# EAGLE board adapter (EAGLE 7.2.0)
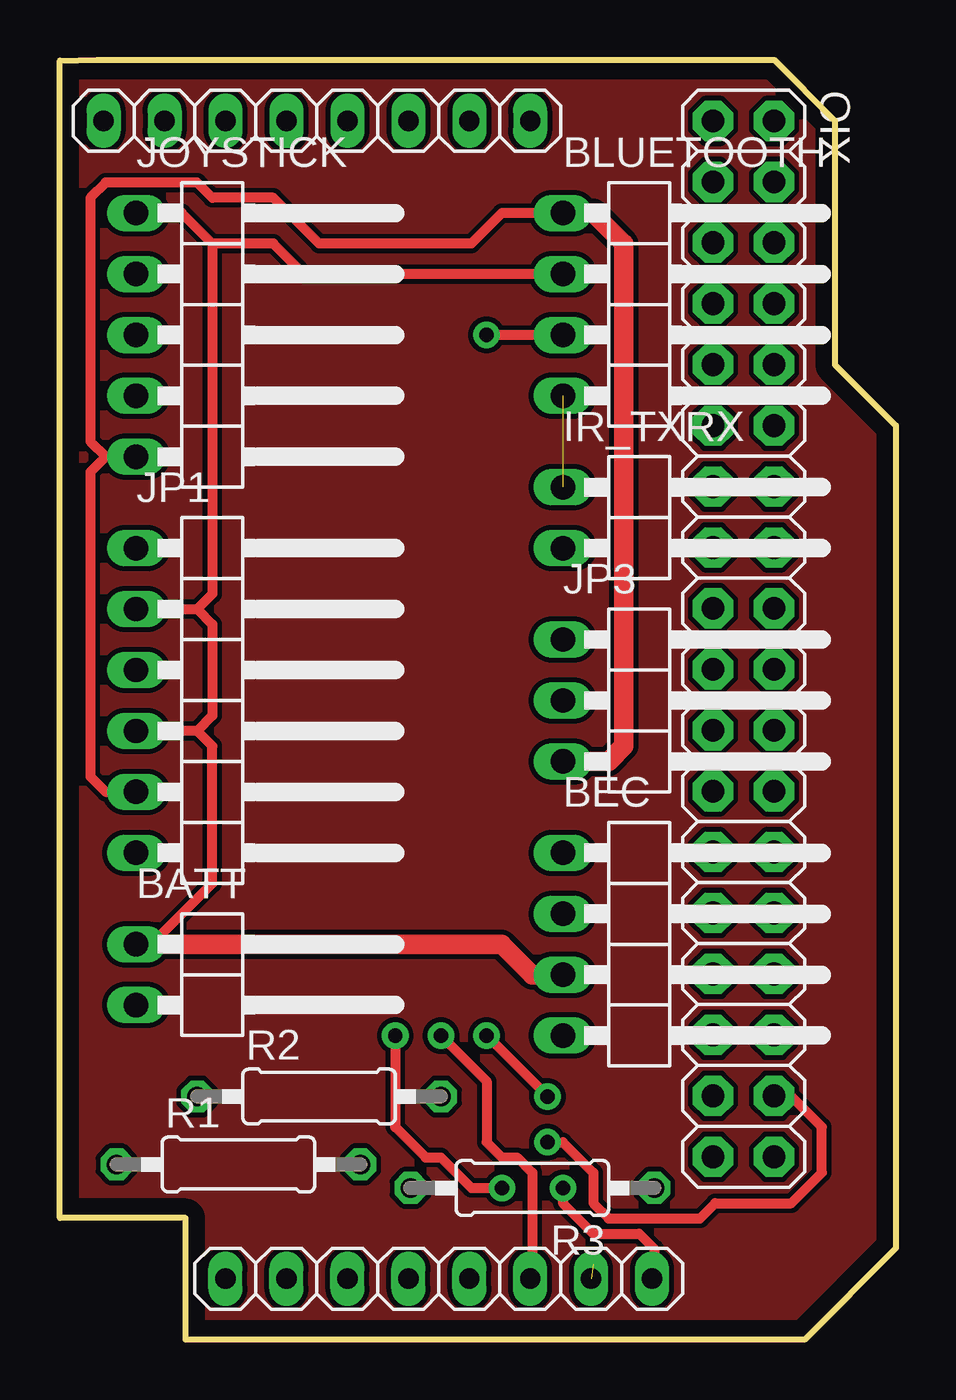
[diagram p0: board, top side]
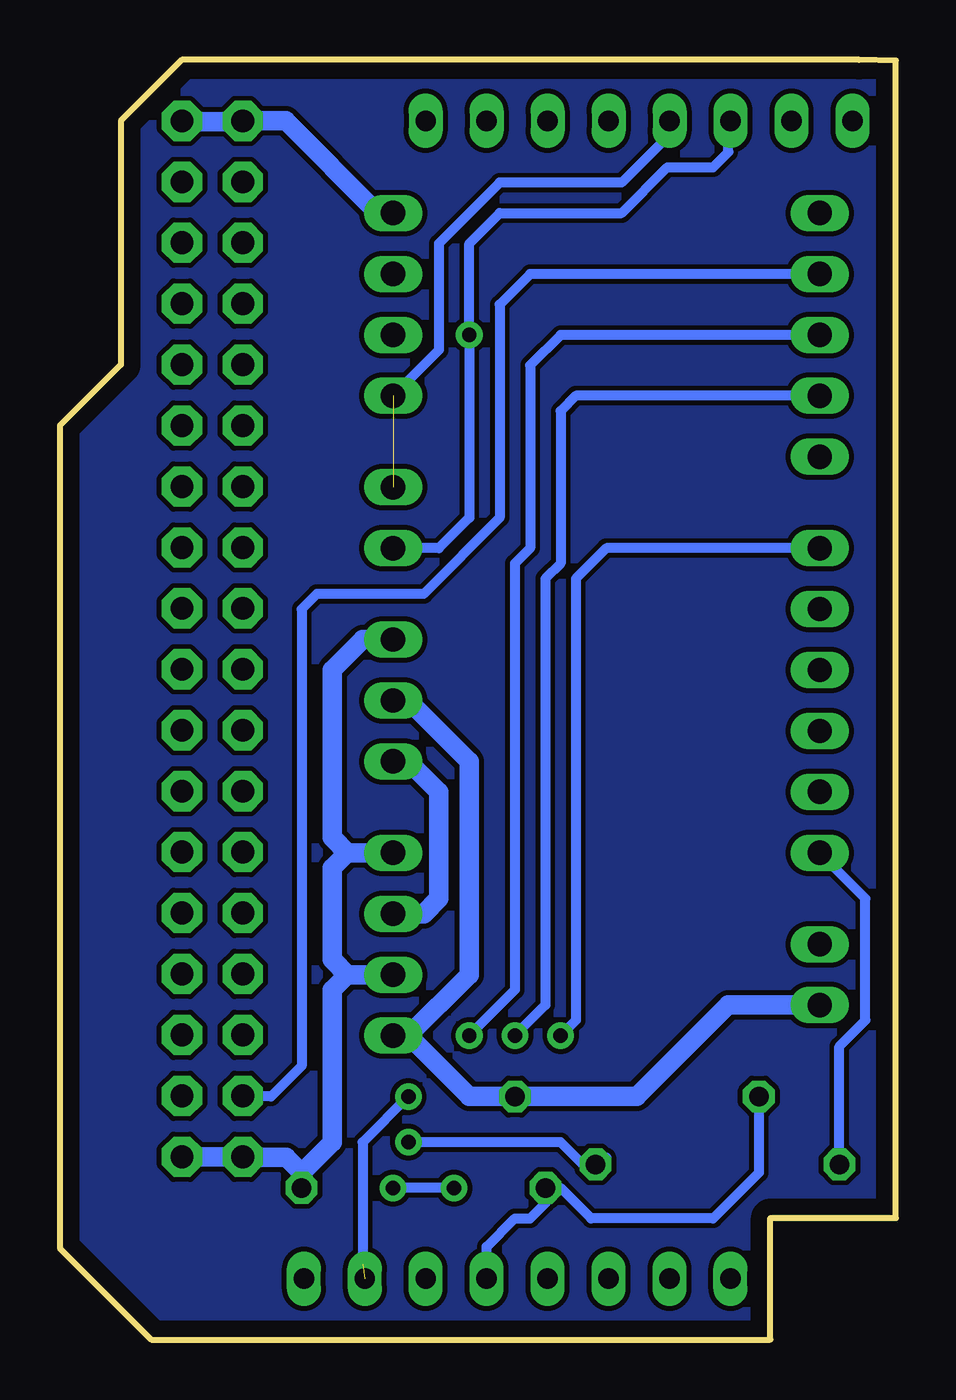
[diagram p1: board, bottom side, seen from below]

Size 34.84 x 53.34 mm. Coordinates in mm from the lower left corner, seen from the top.
Outline: 29.75,53.34 32.3,50.8 32.3,40.64 34.84,38.1 34.84,3.81 31.02,0 5.24,0 5.24,5.07 0,5.07 0,53.31 1.53,53.34 29.75,53.34
Copper layers (1*16): Top 0.035mm / dielectric 1.5mm / Bottom 0.035mm
Design rules "default": minimum track width 8mil, minimum drill 16mil, track to track 7mil, track to pad 7mil, pad to pad 8mil, via to via 10mil, smd to smd 7mil, copper to edge 27mil, drill to drill 12mil, minimum pad ring 10mil, minimum via ring 10mil, stop-mask expansion 2mil, vias tented up to drill 24mil, thermal gap 10mil
Net classes: 0 default: width 0.203 mm, drill 0.406 mm, clearance 0.203 mm; 1 power: width 0.61 mm, drill 0.406 mm, clearance 0.203 mm; 2 gnd: width 0.305 mm, drill 0.406 mm, clearance 0.203 mm; 3 power usb: width 0.508 mm, drill 0.406 mm, clearance 0.203 mm

## Footprints (pad centres in the part's own frame; a part is rotated, then mirrored left to right if it is on the bottom)
1X08 = drill 0.85 pad 1.422 long: 1 -8.89,0; 2 -6.35,0; 3 -3.81,0; 4 -1.27,0; 5 1.27,0; 6 3.81,0; 7 6.35,0; 8 8.89,0
1X02/90 = drill 1.016 long: 1 -1.27,-3.81; 2 1.27,-3.81
1X04/90 = drill 1.016 long: 1 -3.81,-3.81; 2 -1.27,-3.81; 3 1.27,-3.81; 4 3.81,-3.81
1X05/90 = drill 1.016 long: 1 -5.08,-3.81; 2 -2.54,-3.81; 3 0,-3.81; 4 2.54,-3.81; 5 5.08,-3.81
1X06/90 = drill 1.016 long: 1 -6.35,-3.81; 2 -3.81,-3.81; 3 -1.27,-3.81; 4 1.27,-3.81; 5 3.81,-3.81; 6 6.35,-3.81
1X03/90 = drill 1.016 long: 1 -2.54,-3.81; 2 0,-3.81; 3 2.54,-3.81
0207/10 = drill 0.813 octagon: 1 -5.08,0; 2 5.08,0
2X18 = drill 0.95 pad 1.676 octagon: 1 -21.59,-1.27; 2 -21.59,1.27; 3 -19.05,-1.27; 4 -19.05,1.27; 5 -16.51,-1.27; 6 -16.51,1.27; 7 -13.97,-1.27; 8 -13.97,1.27; 9 -11.43,-1.27; 10 -11.43,1.27; 11 -8.89,-1.27; 12 -8.89,1.27; 13 -6.35,-1.27; 14 -6.35,1.27; 15 -3.81,-1.27; 16 -3.81,1.27; 17 -1.27,-1.27; 18 -1.27,1.27; 19 1.27,-1.27; 20 1.27,1.27; 21 3.81,-1.27; 22 3.81,1.27; 23 6.35,-1.27; 24 6.35,1.27; 25 8.89,-1.27; 26 8.89,1.27; 27 11.43,-1.27; 28 11.43,1.27; 29 13.97,-1.27; 30 13.97,1.27; 31 16.51,-1.27; 32 16.51,1.27; 33 19.05,-1.27; 34 19.05,1.27; 35 21.59,-1.27; 36 21.59,1.27

## Placement (x,y rotation side)
ADCH  8x1F-H8.5  [1X08]  15.79,2.54 0 top
BATT  [1X02/90]  6.99,15.21 270 top
BEC  [1X04/90]  24.77,16.48 270 top
BLUETOOTH  [1X04/90]  24.77,43.15 270 top
COMMUNICATION  8x1F-H8.5  [1X08]  10.71,50.8 180 top
IR_TXRX  [1X02/90]  24.77,34.26 270 top
JOYSTICK  [1X05/90]  6.99,41.88 270 top
JP1  [1X06/90]  6.99,26.64 270 top
JP3  IR_PWR  [1X03/90]  24.77,26.64 270 top
R1  [0207/10]  7.43,7.3 0 top
R2  [0207/10]  10.79,10.13 0 top
R3  [0207/10]  19.68,6.32 180 top
XIO  [2X18]  28.48,29.21 270 top

## Library data of the parts
ADCH COMMUNICATION XIO = SmartPrj
BATT BEC BLUETOOTH IR_TXRX JOYSTICK JP1 JP3 = pinhead
R1-R3 = rcl

## Nets
2: ADCH.8 JP1.1
12V: BATT.2 BEC.4 JP3.2 R2.2
53: R1.2 XIO.34
B: JP1.6 R1.1
BATTVOL: ADCH.5 R2.1 R3.2
GND: BATT.1 BEC.1 BEC.3 BLUETOOTH.2 JOYSTICK.1 JP1.2 JP1.4 JP3.1 R3.1 XIO.35 XIO.36
HORZ: ADCH.7 JOYSTICK.3
L: JP1.3
RX: BLUETOOTH.4 COMMUNICATION.5 IR_TXRX.1
SEL: JOYSTICK.2 XIO.33
TX: BLUETOOTH.3 COMMUNICATION.6 IR_TXRX.2
VCC: BEC.2 BLUETOOTH.1 JOYSTICK.5 JP1.5 JP3.3 XIO.1 XIO.2
VERT: ADCH.6 JOYSTICK.4

## Tracks (layer width: path | path; a pad name or v marks a point on that pad's centre or on a via)
2  (via drill 0.6)
  Top 0.406: v13.97,12.67 13.97,8.86 15.24,7.59 15.88,7.59 17.14,6.32 v18.41,6.32 | ADCH.8 24.77,2.63 24.77,3.78 24.13,4.42 22.23,4.42 20.95,5.68 v20.95,6.32
  Bottom 0.406: JP1.1 12.06,32.99 13.34,31.72 13.34,13.31 v13.97,12.67 | v18.41,6.32 v20.95,6.32
12V
  Bottom 0.813: BATT.2 6.99,13.94 10.79,10.13 R2.2 17.78,10.13 20.32,12.67 | BEC.4 20.32,12.67 | JP3.2 20.32,26.64 17.78,24.1 17.78,15.21 20.32,12.67
53  (via drill 0.6)
  Top 0.406: v20.32,8.23 20.95,8.23 22.23,6.96 22.23,5.68 22.86,5.05 26.67,5.05 27.3,5.68 30.48,5.68 31.75,6.96 31.75,8.86 30.48,10.13 29.79,10.13 XIO.34
  Bottom 0.406: 29.84,10.13 XIO.34 | 12.06,7.59 R1.2 13.04,7.3 13.97,8.23 v20.32,8.23
B
  Bottom 0.406: R1.1 2.35,12.22 1.27,13.31 1.27,18.38 JP1.6
BATTVOL
  Bottom 0.406: R2.1 5.71,6.96 7.62,5.05 12.7,5.05 13.97,6.32 R3.2 14.61,5.68 15.24,5.05 15.88,5.05 17.05,3.87 ADCH.5
GND
  Top 0.406: JOYSTICK.1 5.08,46.96 6.35,45.69 | 6.35,45.69 6.35,31.08 5.71,30.45 | BLUETOOTH.2 10.16,44.42 8.89,45.69 6.35,45.69 | JP1.2 5.71,30.45 | 5.71,30.45 6.35,29.81 6.35,26 5.71,25.37 | 5.71,25.37 JP1.4 | BATT.1 3.81,16.48 6.35,19.02 6.35,24.73 5.71,25.37
  Top 0.813: BATT.1 18.41,16.48 19.68,15.21 BEC.3
  Bottom 0.813: BEC.3 22.86,15.21 | 22.86,15.21 23.5,15.85 23.5,19.65 22.86,20.29 | 22.86,20.29 BEC.1 | JP3.1 22.23,29.18 23.5,27.91 23.5,20.92 22.86,20.29 | 22.86,15.21 23.5,14.58 23.5,8.23 24.77,6.96 | 24.77,6.96 R3.1 | 24.77,6.96 25.4,7.59 27.18,7.59 XIO.35 XIO.36
HORZ  (via drill 0.6)  (1 unrouted)
  Top 0.406: v17.78,12.67 v20.32,10.13
  Bottom 0.406: JOYSTICK.3 13.97,41.88 15.24,40.61 15.24,32.99 15.88,32.35 15.88,14.58 v17.78,12.67 | v20.32,10.13 22.23,8.23 22.23,3.15
N$1
  pour Bottom: 0,53.31 29.84,53.31 32.38,50.77 32.38,40.61 34.92,38.07 34.92,3.78 31.11,-0.03 5.71,-0.03 5.08,-0.03 5.08,5.05 0,5.05
N$2
  pour Top: 0,53.31 29.84,53.31 32.38,50.77 32.38,40.61 34.92,38.07 34.92,3.78 31.11,-0.03 5.08,-0.03 5.08,5.05 0,5.05
RX  (1 unrouted)
  Bottom 0.406: COMMUNICATION.5 9.44,50.23 11.43,48.23 16.51,48.23 19.05,45.69 19.05,41.24 BLUETOOTH.4
SEL
  Bottom 0.406: JOYSTICK.2 15.24,44.42 16.51,43.15 16.51,34.26 19.68,31.08 24.13,31.08 24.77,30.45 24.77,11.4 26.04,10.13 27.18,10.13 XIO.33
TX  (via drill 0.6)
  Top 0.406: BLUETOOTH.3 v17.78,41.88
  Bottom 0.406: IR_TXRX.2 19.05,32.99 17.78,34.26 v17.78,41.88 17.78,45.69 16.51,46.96 11.43,46.96 9.53,48.87 7.62,48.87 6.99,49.5 6.99,50.71 COMMUNICATION.6
VCC
  Top 0.406: BLUETOOTH.1 18.41,46.96 17.14,45.69 10.79,45.69 8.89,47.59 6.35,47.59 5.71,48.23 1.91,48.23 1.27,47.59 1.27,37.44 1.91,36.8 | JOYSTICK.5 1.91,36.8 | 1.91,36.8 1.27,36.16 1.27,23.46 1.91,22.83 JP1.5
  Top 0.813: BLUETOOTH.1 22.23,46.96 23.5,45.69 23.5,24.73 22.86,24.1 JP3.3
  Bottom 0.813: JP3.3 20.32,24.1 19.05,22.83 19.05,18.38 19.68,17.75 BEC.2 | XIO.2 29.82,50.8 29.84,50.77 27.25,50.77 XIO.1 25.43,50.8 21.59,46.96 BLUETOOTH.1
VERT  (via drill 0.6)
  Top 0.406: v15.88,12.67 17.78,10.77 17.78,8.23 18.41,7.59 19.05,7.59 19.68,6.96 19.68,2.63 ADCH.6
  Bottom 0.406: JOYSTICK.4 13.34,39.34 13.97,38.7 13.97,32.35 14.61,31.72 14.61,13.94 v15.88,12.67